# Altium PCB PCB1.PcbDoc (part 2 of 2)
Units mil, origin at the board's own origin, x right, y up, seen from the top; angles counter-clockwise.
Board outline 2145 x 1950 mil, 2 copper layers (Top Layer, Bottom Layer); 45 components, 40 nets, 204 pads, 256 vias.
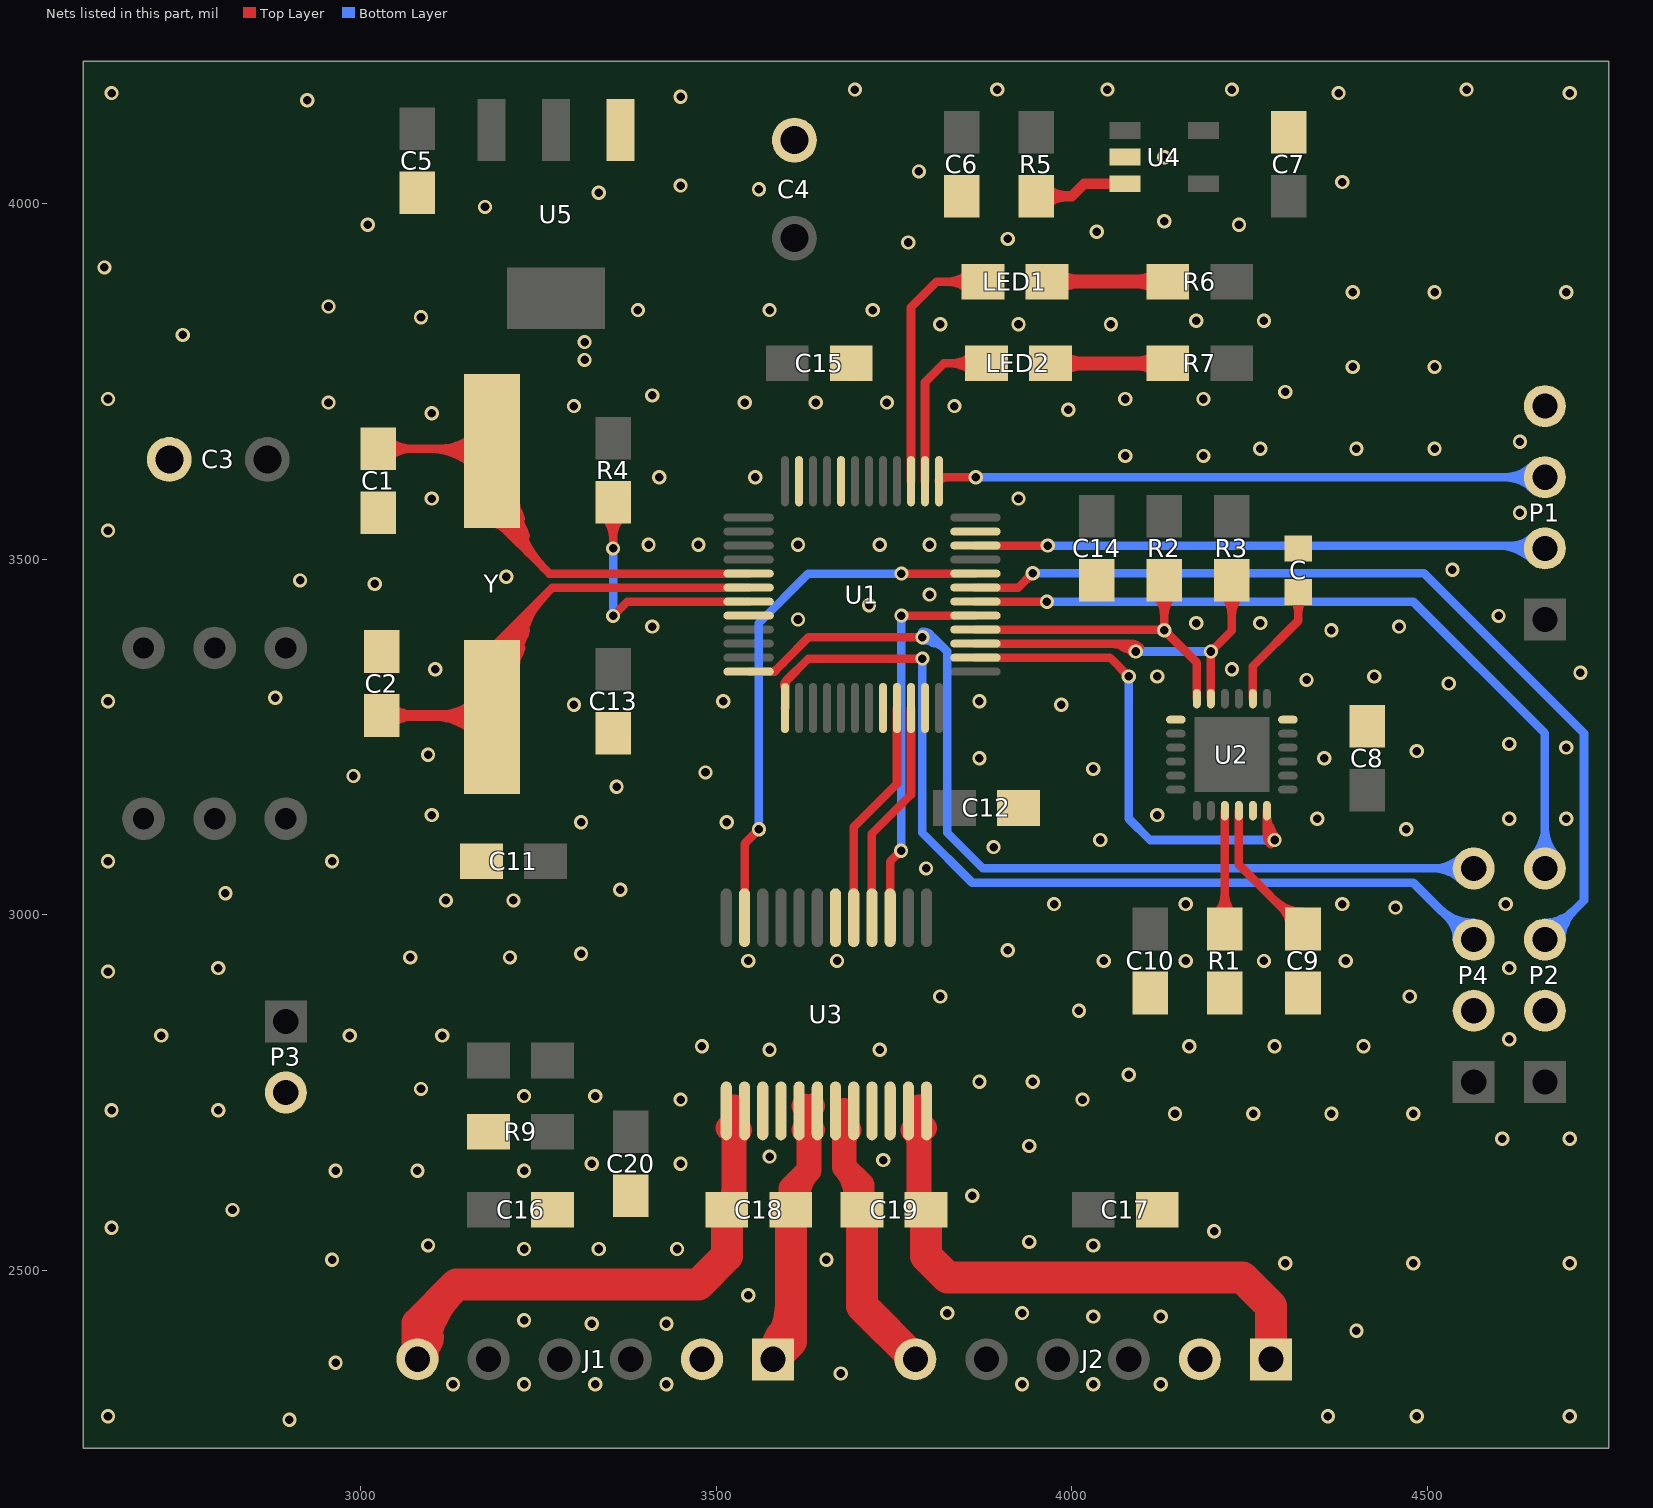
[diagram p2: the nets of this part, all layers, seen from the top]

## Via types
v1: diameter 20, hole 12, Top Layer to Bottom Layer, 256 vias

## Nets (pads, with @x,y where several pads share a name; then routed paths per layer and width w, separated by ;. In a path a pad name is that pad's centre, name@x,y a point inside that pad or via, vN(x,y) a via of type N, cw(c..) or ccw(c..) an arc to the next point about the centre after c; other vN are vias at no path point) (continued)
BIN1: U1.21 U3.17 | length 319.9
  Top Layer w12: U3.17@3693.39,2995.83 3693.39,3123.39 3754.21,3184.21 U1.21@3754.21,3290.55
BIN2: U1.22 U3.16 | length 317.5
  Top Layer w12: U3.16@3718.98,2995.83 3718.98,3113.98 3773.9,3168.9 U1.22@3773.9,3290.55
GND: C1.2 C2.2 C3.2 C4.2 C5.2 C6.2 C7.2 C8.2 C9.2 C10.2 C11.2 C12.2 C13.2 C14.2 C15.2 C16.1 C17.1 C20.2 C.2 J1.2 J2.2 P1.4 P2.2 P3.2 P4.2 R1.1 R9.1 U1.8 U1.20 U1.23 U1.35 U1.44 U1.47 U2.1 U2.11 U2.18 U3.3 U3.4 U3.9 U3.10 U3.18 U4.2 U5.1
  other v1: 2900,2290 2645,2295 4360,2295 4485,2295 4700,2295 3130,2340 3230,2340 3330,2340 3430,2340 3930,2340 4030,2340 4125,2340 3675,2355 2965,2370 4400,2415 3325,2425 3430,2425 3230,2430 4030,2435 4125,2435 3825,2440 3930,2440 3545,2465 4300,2510 4480,2510 4700,2510 2960,2515 3655,2515 3230,2530 3335,2530 3335,2530 3445,2530 3095,2535 4030,2535 3940,2540 4200,2555 2650,2560 2820,2585 3860,2605 2965,2640 3080,2640 3230,2640 3325,2650 3450,2650 3735,2655 3575,2660 3940,2675 4605,2685 4700,2685 4145,2720 4255,2720 4365,2720 4480,2720 2650,2725 2800,2725 3450,2740 4015,2740 3230,2745 3330,2745 3085,2755 3870,2765 3945,2765 4080,2775 3575,2810 3730,2810 3480,2815 4165,2815 4285,2815 4410,2815 4410,2815 4615,2825 2720,2830 2985,2830 3115,2830 4010,2865 3815,2885 4475,2885 2645,2920 2800,2925 4615,2925 3545,2935 3670,2935 4045,2935 4160,2935 4270,2935 4385,2935 3070,2940 3210,2940 3310,2945 3910,2950 4455,3010 3975,3015 4160,3015 4380,3015 4610,3015 3120,3020 3215,3020 2810,3030 3365,3035 3795,3065 2645,3075 2960,3075 3890,3095 4040,3105 4470,3120 3310,3130 3515,3130 4345,3135 4615,3135 4695,3135 3100,3140 4120,3140 3360,3180 2990,3195 3485,3200 4030,3205 3870,3220 4355,3220 3095,3225 4485,3230 4695,3235 4615,3240 3300,3295 3985,3295 2645,3300 3510,3300 3870,3300 2880,3305 4530,3325 4330,3330 4120,3335 4425,3335 4715,3340 3105,3345 4225,3345 4365,3400 3410,3405 4460,3405 4175,3410 4265,3410 3615,3415 4600,3420 4600,3420 3715,3435 3800,3450 3020,3465 2915,3470 3205,3475 4535,3485 3405,3520 3475,3520 3615,3520 3730,3520 3800,3520 2645,3540 4630,3565 3100,3585 3925,3585 3420,3615 3555,3615 4075,3645 4185,3645 4265,3655 4400,3655 4510,3655 4630,3665 3100,3705 3995,3710 3300,3715 3835,3715 2955,3720 3540,3720 3640,3720 3740,3720 2645,3725 4075,3725 4185,3725 3410,3730 4300,3735 4395,3770 4510,3770 3315,3780 3315,3805 2750,3815 3815,3830 3925,3830 4055,3830 4175,3835 4270,3835 3085,3840 3390,3850 3575,3850 3720,3850 2955,3855 4395,3875 4510,3875 4695,3875 2640,3910 3770,3945 3910,3950 4035,3960 3010,3970 4235,3970 4130,3975 3175,3995 3335,4015 3560,4020 3450,4025 4380,4030 3785,4045 4130,4065 2925,4145 3450,4150 2650,4155 4375,4155 4700,4155 3695,4160 3895,4160 4050,4160 4225,4160 4555,4160
INT: U1.26 U2.12 | length 905.8
  Top Layer w12: U1.26@3864.45,3361.42 4053.58,3361.42 v1(4080,3335) ; U2.12@4274.21,3146.26 4274.21,3115.79 v1(4285,3105) ; 4281.14,3117.86 ccw(c4291.59,3117.86) v1@4286.82,3108.56 ; 4274.21,3111.73 ccw(c4291.73,3111.73) v1@4279.34,3099.34 ; 4274.21,3111.73 ccw(c4291.73,3111.73) v1@4279.34,3099.34 ; 4274.21,3111.73 ccw(c4291.73,3111.73) v1@4279.34,3099.34 ; U2.12@4274.21,3140.7 ccw(c4320.7,3140.7) v1@4287.83,3107.83 ; U2.12@4274.21,3140.7 ccw(c4320.7,3140.7) v1@4287.83,3107.83 ; U2.12@4274.21,3140.7 ccw(c4320.7,3140.7) v1@4287.83,3107.83 ; 4278.85,3123.37 cw(c4259.07,3111.95) v1@4281.14,3106.04 ; 4278.85,3123.37 cw(c4259.07,3111.95) v1@4281.14,3106.04 ; 4278.85,3123.37 cw(c4259.07,3111.95) v1@4281.14,3106.04
  Bottom Layer w12: v1(4080,3335) 4080,3135 4110,3105 v1(4285,3105)
LED1: LED1.2 U1.39 | length 576.7
  Top Layer w12: U1.39@3773.9,3609.45 3773.9,3853.9 3810,3890 LED1.2@3875,3890 ; 3824.13,3890 cw(c3824.13,3844.13) LED1.2@3856.56,3876.56 ; 3824.13,3890 ccw(c3824.13,3935.87) LED1.2@3856.56,3903.44 ; 3824.13,3890 cw(c3824.13,3844.13) LED1.2@3856.56,3876.56 ; 3824.13,3890 ccw(c3824.13,3935.87) LED1.2@3856.56,3903.44 ; 3824.13,3890 cw(c3824.13,3844.13) LED1.2@3856.56,3876.56 ; 3824.13,3890 ccw(c3824.13,3935.87) LED1.2@3856.56,3903.44
LED2: LED2.2 U1.38 | length 452.7
  Top Layer w12: U1.38@3793.58,3609.45 3793.58,3748.58 3820,3775 LED2.2@3880,3775 ; 3829.13,3775 cw(c3829.13,3729.13) LED2.2@3861.56,3761.56 ; 3829.13,3775 ccw(c3829.13,3820.87) LED2.2@3861.56,3788.44 ; 3829.13,3775 cw(c3829.13,3729.13) LED2.2@3861.56,3761.56 ; 3829.13,3775 ccw(c3829.13,3820.87) LED2.2@3861.56,3788.44 ; 3829.13,3775 cw(c3829.13,3729.13) LED2.2@3861.56,3761.56 ; 3829.13,3775 ccw(c3829.13,3820.87) LED2.2@3861.56,3788.44
MA1: C18.1 J1.6 U3.1 U3.2 | length 1639.2
  Top Layer w35: C18.1@3515,2585 3525,2595 3525,2730 ; C18.1@3514.7,2590.3 ccw(c3489.82,2615.18) 3525,2615.18 ; C18.1@3514.7,2590.3 ccw(c3489.82,2615.18) 3525,2615.18 ; C18.1@3514.7,2590.3 ccw(c3489.82,2615.18) 3525,2615.18 ; C18.1@3514.7,2590.3 ccw(c3489.82,2615.18) 3525,2615.18 ; U3.1@3516.74,2700.01 cw(c3514.54,2691.79) U3.1@3521.91,2696.04 ; U3.1@3516.74,2700.01 cw(c3514.54,2691.79) U3.1@3521.91,2696.04 ; U3.1@3516.74,2700.01 cw(c3514.54,2691.79) U3.1@3521.91,2696.04 ; U3.1@3516.74,2700.01 cw(c3514.54,2691.79) U3.1@3521.91,2696.04 ; U3.1@3516.74,2700.01 cw(c3514.54,2691.79) U3.1@3521.91,2696.04 ; U3.1@3516.74,2700.01 cw(c3514.54,2691.79) U3.1@3521.91,2696.04 ; U3.1@3521.06,2697.52 cw(c3511.54,2688) 3525,2688 ; U3.1@3521.06,2697.52 cw(c3511.54,2688) 3525,2688 ; U3.1@3521.06,2697.52 cw(c3511.54,2688) 3525,2688 ; U3.1@3521.06,2697.52 cw(c3511.54,2688) 3525,2688 ; 3525,2678.11 cw(c3552.44,2678.11) U3.2@3533.04,2697.52 ; 3525,2678.11 cw(c3552.44,2678.11) U3.2@3533.04,2697.52 ; 3525,2678.11 cw(c3552.44,2678.11) U3.2@3533.04,2697.52 ; 3525,2678.11 cw(c3552.44,2678.11) U3.2@3533.04,2697.52
  Top Layer w45: J1.6@3080,2375 3080,2425 3135,2480 3475,2480 3515,2520 C18.1@3515,2585 ; J1.6@3076.49,2381.09 ccw(c3056.42,2415.85) 3095.19,2405.46 ; J1.6@3076.49,2381.09 ccw(c3056.42,2415.85) 3095.19,2405.46 ; J1.6@3076.49,2381.09 ccw(c3056.42,2415.85) 3095.19,2405.46 ; J1.6@3076.49,2381.09 ccw(c3056.42,2415.85) 3095.19,2405.46 ; J1.6@3076.49,2381.09 ccw(c3056.42,2415.85) 3095.19,2405.46 ; J1.6@3076.49,2381.09 ccw(c3056.42,2415.85) 3095.19,2405.46 ; J1.6@3087.03,2375 cw(c3224.7,2375) 3127.35,2472.35 ; J1.6@3087.03,2375 cw(c3224.7,2375) 3127.35,2472.35 ; J1.6@3087.03,2375 cw(c3224.7,2375) 3127.35,2472.35 ; J1.6@3087.03,2375 cw(c3224.7,2375) 3127.35,2472.35
MA2: C18.2 J1.1 U3.5 U3.6 | length 1570
  Top Layer w35: C18.2@3605,2585 3605,2615 3630.42,2640.42 ; 3630.42,2724.17 3630.42,2640.42 ; C18.2@3604.51,2590.11 ccw(c3573.16,2619.3) 3615.97,2620.83 ; C18.2@3604.51,2590.11 ccw(c3573.16,2619.3) 3615.97,2620.83 ; C18.2@3604.51,2590.11 ccw(c3573.16,2619.3) 3615.97,2620.83 ; C18.2@3604.51,2590.11 ccw(c3573.16,2619.3) 3615.97,2620.83 ; C18.2@3604.51,2590.11 ccw(c3573.16,2619.3) 3615.97,2620.83 ; C18.2@3604.51,2590.11 ccw(c3573.16,2619.3) 3615.97,2620.83 ; C18.2@3617.17,2587.2 cw(c3668.05,2602.79) 3630.42,2640.42 ; C18.2@3617.17,2587.2 cw(c3668.05,2602.79) 3630.42,2640.42 ; C18.2@3617.17,2587.2 cw(c3668.05,2602.79) 3630.42,2640.42 ; C18.2@3617.17,2587.2 cw(c3668.05,2602.79) 3630.42,2640.42 ; U3.5@3623.42,2697.52 cw(c3606.52,2680.61) 3630.42,2680.61 ; U3.5@3623.42,2697.52 cw(c3606.52,2680.61) 3630.42,2680.61 ; U3.5@3623.42,2697.52 cw(c3606.52,2680.61) 3630.42,2680.61 ; U3.5@3623.42,2697.52 cw(c3606.52,2680.61) 3630.42,2680.61 ; U3.5@3623.42,2730.98 cw(c3606.52,2714.08) 3630.42,2714.08 ; U3.5@3623.42,2730.98 cw(c3606.52,2714.08) 3630.42,2714.08 ; U3.5@3623.42,2730.98 cw(c3606.52,2714.08) 3630.42,2714.08 ; U3.5@3623.42,2730.98 cw(c3606.52,2714.08) 3630.42,2714.08 ; 3630.42,2685.5 cw(c3647.41,2685.5) U3.6@3635.4,2697.52 ; 3630.42,2685.5 cw(c3647.41,2685.5) U3.6@3635.4,2697.52 ; 3630.42,2685.5 cw(c3647.41,2685.5) U3.6@3635.4,2697.52 ; 3630.42,2685.5 cw(c3647.41,2685.5) U3.6@3635.4,2697.52 ; 3630.42,2718.96 cw(c3647.41,2718.96) U3.6@3635.4,2730.98 ; 3630.42,2718.96 cw(c3647.41,2718.96) U3.6@3635.4,2730.98 ; 3630.42,2718.96 cw(c3647.41,2718.96) U3.6@3635.4,2730.98 ; 3630.42,2718.96 cw(c3647.41,2718.96) U3.6@3635.4,2730.98
  Top Layer w45: J1.1@3580,2375 3605,2400 C18.2@3605,2585 ; J1.1@3575.03,2379.97 ccw(c3502.68,2452.32) 3605,2452.32 ; J1.1@3575.03,2379.97 ccw(c3502.68,2452.32) 3605,2452.32 ; J1.1@3575.03,2379.97 ccw(c3502.68,2452.32) 3605,2452.32 ; J1.1@3575.03,2379.97 ccw(c3502.68,2452.32) 3605,2452.32 ; J1.1@3586.79,2376.82 cw(c3625.56,2387.21) 3590.8,2407.28 ; J1.1@3586.79,2376.82 cw(c3625.56,2387.21) 3590.8,2407.28 ; J1.1@3586.79,2376.82 cw(c3625.56,2387.21) 3590.8,2407.28 ; J1.1@3586.79,2376.82 cw(c3625.56,2387.21) 3590.8,2407.28 ; J1.1@3586.79,2376.82 cw(c3625.56,2387.21) 3590.8,2407.28 ; J1.1@3586.79,2376.82 cw(c3625.56,2387.21) 3590.8,2407.28
MB1: C19.1 J2.6 U3.7 U3.8 | length 710.6
  Top Layer w35: 3680,2725 3680,2645 ; C19.1@3705,2585 3705,2620 3680,2645 ; 3680,2645 cw(c3641.04,2606.04) C19.1@3692.94,2587.52 ; 3680,2645 cw(c3641.04,2606.04) C19.1@3692.94,2587.52 ; 3680,2645 cw(c3641.04,2606.04) C19.1@3692.94,2587.52 ; 3680,2645 cw(c3641.04,2606.04) C19.1@3692.94,2587.52 ; 3680,2681.63 cw(c3702.46,2681.63) U3.8@3686.58,2697.52 ; 3680,2681.63 cw(c3702.46,2681.63) U3.8@3686.58,2697.52 ; 3680,2681.63 cw(c3702.46,2681.63) U3.8@3686.58,2697.52 ; 3680,2681.63 cw(c3702.46,2681.63) U3.8@3686.58,2697.52
  Top Layer w45: C19.1@3705,2585 3705,2450 J2.6@3780,2375
MB2: C19.2 J2.1 U3.11 U3.12 | length 1082.2
  Top Layer w35: 3785,2730 3785,2595 C19.2@3795,2585 ; U3.11@3776.96,2697.52 cw(c3757.56,2678.11) 3785,2678.11 ; U3.11@3776.96,2697.52 cw(c3757.56,2678.11) 3785,2678.11 ; U3.11@3776.96,2697.52 cw(c3757.56,2678.11) 3785,2678.11 ; U3.11@3776.96,2697.52 cw(c3757.56,2678.11) 3785,2678.11 ; 3785,2615.18 ccw(c3820.18,2615.18) C19.2@3795.3,2590.3 ; 3785,2615.18 ccw(c3820.18,2615.18) C19.2@3795.3,2590.3 ; 3785,2615.18 ccw(c3820.18,2615.18) C19.2@3795.3,2590.3 ; 3785,2615.18 ccw(c3820.18,2615.18) C19.2@3795.3,2590.3 ; 3785,2688 cw(c3798.46,2688) U3.12@3788.94,2697.52 ; 3785,2688 cw(c3798.46,2688) U3.12@3788.94,2697.52 ; 3785,2688 cw(c3798.46,2688) U3.12@3788.94,2697.52 ; 3785,2688 cw(c3798.46,2688) U3.12@3788.94,2697.52 ; U3.12@3788.09,2696.04 cw(c3795.46,2691.79) U3.12@3793.26,2700.01 ; U3.12@3788.09,2696.04 cw(c3795.46,2691.79) U3.12@3793.26,2700.01 ; U3.12@3788.09,2696.04 cw(c3795.46,2691.79) U3.12@3793.26,2700.01 ; U3.12@3788.09,2696.04 cw(c3795.46,2691.79) U3.12@3793.26,2700.01 ; U3.12@3788.09,2696.04 cw(c3795.46,2691.79) U3.12@3793.26,2700.01 ; U3.12@3788.09,2696.04 cw(c3795.46,2691.79) U3.12@3793.26,2700.01
  Top Layer w45: C19.2@3795,2585 3795,2520 3825,2490 4240,2490 4280,2450 J2.1@4280,2375
NetC1_1: C1.1 U1.5 Y.2 | length 3947.8
  Top Layer w12: C1.1@3025,3655 Y.2@3185,3655 ; Y.2@3185,3652.01 3185,3560 3265.47,3479.53 U1.5@3545.55,3479.53 ; C1.1@3038.44,3641.56 cw(c3070.87,3609.13) 3070.87,3655 ; C1.1@3038.44,3641.56 cw(c3070.87,3609.13) 3070.87,3655 ; C1.1@3038.44,3641.56 cw(c3070.87,3609.13) 3070.87,3655 ; C1.1@3038.44,3641.56 cw(c3070.87,3609.13) 3070.87,3655 ; C1.1@3038.44,3668.44 ccw(c3070.87,3700.87) 3070.87,3655 ; C1.1@3038.44,3668.44 ccw(c3070.87,3700.87) 3070.87,3655 ; C1.1@3038.44,3668.44 ccw(c3070.87,3700.87) 3070.87,3655 ; C1.1@3038.44,3668.44 ccw(c3070.87,3700.87) 3070.87,3655 ; 3097.21,3655 cw(c3097.21,3564.22) Y.2@3161.4,3628.41 ; 3097.21,3655 cw(c3097.21,3564.22) Y.2@3161.4,3628.41 ; 3097.21,3655 cw(c3097.21,3564.22) Y.2@3161.4,3628.41 ; 3097.21,3655 cw(c3097.21,3564.22) Y.2@3161.4,3628.41 ; 3111.66,3655 ccw(c3111.66,3725.34) Y.2@3161.4,3675.6 ; 3111.66,3655 ccw(c3111.66,3725.34) Y.2@3161.4,3675.6 ; 3111.66,3655 ccw(c3111.66,3725.34) Y.2@3161.4,3675.6 ; 3111.66,3655 ccw(c3111.66,3725.34) Y.2@3161.4,3675.6 ; 3126.18,3655 cw(c3126.18,3593.19) Y.2@3169.89,3636.9 ; 3126.18,3655 cw(c3126.18,3593.19) Y.2@3169.89,3636.9 ; 3126.18,3655 cw(c3126.18,3593.19) Y.2@3169.89,3636.9 ; 3126.18,3655 cw(c3126.18,3593.19) Y.2@3169.89,3636.9 ; 3140.63,3655 ccw(c3140.63,3696.37) Y.2@3169.89,3667.12 ; 3140.63,3655 ccw(c3140.63,3696.37) Y.2@3169.89,3667.12 ; 3140.63,3655 ccw(c3140.63,3696.37) Y.2@3169.89,3667.12 ; 3140.63,3655 ccw(c3140.63,3696.37) Y.2@3169.89,3667.12 ; Y.2@3182.31,3574.14 cw(c3166.81,3522.51) 3218.87,3536.46 ; Y.2@3182.31,3574.14 cw(c3166.81,3522.51) 3218.87,3536.46 ; Y.2@3182.31,3574.14 cw(c3166.81,3522.51) 3218.87,3536.46 ; Y.2@3182.31,3574.14 cw(c3166.81,3522.51) 3218.87,3536.46 ; Y.2@3182.31,3574.14 cw(c3166.81,3522.51) 3218.87,3536.46 ; Y.2@3182.31,3574.14 cw(c3166.81,3522.51) 3218.87,3536.46 ; Y.2@3185,3549.74 cw(c3185,3524.97) 3202.52,3542.48 ; Y.2@3185,3549.74 cw(c3185,3524.97) 3202.52,3542.48 ; Y.2@3185,3549.74 cw(c3185,3524.97) 3202.52,3542.48 ; Y.2@3185,3549.74 cw(c3185,3524.97) 3202.52,3542.48 ; Y.2@3186.04,3585.53 cw(c3154.49,3511.85) 3231.91,3532.59 ; Y.2@3186.04,3585.53 cw(c3154.49,3511.85) 3231.91,3532.59 ; Y.2@3186.04,3585.53 cw(c3154.49,3511.85) 3231.91,3532.59 ; Y.2@3186.04,3585.53 cw(c3154.49,3511.85) 3231.91,3532.59 ; Y.2@3186.04,3585.53 cw(c3154.49,3511.85) 3231.91,3532.59 ; Y.2@3186.04,3585.53 cw(c3154.49,3511.85) 3231.91,3532.59 ; Y.2@3190.76,3596.56 cw(c3166.86,3540.73) 3225.51,3556.45 ; Y.2@3190.76,3596.56 cw(c3166.86,3540.73) 3225.51,3556.45 ; Y.2@3190.76,3596.56 cw(c3166.86,3540.73) 3225.51,3556.45 ; Y.2@3190.76,3596.56 cw(c3166.86,3540.73) 3225.51,3556.45 ; Y.2@3190.76,3596.56 cw(c3166.86,3540.73) 3225.51,3556.45 ; Y.2@3190.76,3596.56 cw(c3166.86,3540.73) 3225.51,3556.45 ; Y.2@3194.37,3583.11 ccw(c3272.78,3583.11) 3217.34,3527.66 ; Y.2@3194.37,3583.11 ccw(c3272.78,3583.11) 3217.34,3527.66 ; Y.2@3194.37,3583.11 ccw(c3272.78,3583.11) 3217.34,3527.66 ; Y.2@3194.37,3583.11 ccw(c3272.78,3583.11) 3217.34,3527.66 ; Y.2@3206.37,3583.11 ccw(c3313.75,3583.11) 3237.82,3507.18 ; Y.2@3206.37,3583.11 ccw(c3313.75,3583.11) 3237.82,3507.18 ; Y.2@3206.37,3583.11 ccw(c3313.75,3583.11) 3237.82,3507.18 ; Y.2@3206.37,3583.11 ccw(c3313.75,3583.11) 3237.82,3507.18 ; Y.2@3218.37,3583.11 ccw(c3354.72,3583.11) 3258.31,3486.69 ; Y.2@3218.37,3583.11 ccw(c3354.72,3583.11) 3258.31,3486.69 ; Y.2@3218.37,3583.11 ccw(c3354.72,3583.11) 3258.31,3486.69 ; Y.2@3218.37,3583.11 ccw(c3354.72,3583.11) 3258.31,3486.69
NetC2_1: C2.1 U1.6 Y.1 | length 5441.2
  Top Layer w12: Y.1@3185,3280 3185,3375 3269.84,3459.84 U1.6@3545.55,3459.84 ; Y.1@3180.99,3355.36 ccw(c3134.91,3452.69) 3239.04,3425.22 ; Y.1@3180.99,3355.36 ccw(c3134.91,3452.69) 3239.04,3425.22 ; Y.1@3180.99,3355.36 ccw(c3134.91,3452.69) 3239.04,3425.22 ; Y.1@3180.99,3355.36 ccw(c3134.91,3452.69) 3239.04,3425.22 ; Y.1@3180.99,3355.36 ccw(c3134.91,3452.69) 3239.04,3425.22 ; Y.1@3180.99,3355.36 ccw(c3134.91,3452.69) 3239.04,3425.22 ; Y.1@3181.77,3368.02 ccw(c3177.32,3397.16) 3205.8,3389.53 ; Y.1@3181.77,3368.02 ccw(c3177.32,3397.16) 3205.8,3389.53 ; Y.1@3181.77,3368.02 ccw(c3177.32,3397.16) 3205.8,3389.53 ; Y.1@3181.77,3368.02 ccw(c3177.32,3397.16) 3205.8,3389.53 ; Y.1@3181.77,3368.02 ccw(c3177.32,3397.16) 3205.8,3389.53 ; Y.1@3181.77,3368.02 ccw(c3177.32,3397.16) 3205.8,3389.53 ; Y.1@3181.84,3355.71 ccw(c3161.5,3412.51) 3219.77,3396.89 ; Y.1@3181.84,3355.71 ccw(c3161.5,3412.51) 3219.77,3396.89 ; Y.1@3181.84,3355.71 ccw(c3161.5,3412.51) 3219.77,3396.89 ; Y.1@3181.84,3355.71 ccw(c3161.5,3412.51) 3219.77,3396.89 ; Y.1@3181.84,3355.71 ccw(c3161.5,3412.51) 3219.77,3396.89 ; Y.1@3181.84,3355.71 ccw(c3161.5,3412.51) 3219.77,3396.89 ; Y.1@3182.37,3346.89 cw(c3243.88,3346.89) 3200.39,3390.39 ; Y.1@3182.37,3346.89 cw(c3243.88,3346.89) 3200.39,3390.39 ; Y.1@3182.37,3346.89 cw(c3243.88,3346.89) 3200.39,3390.39 ; Y.1@3182.37,3346.89 cw(c3243.88,3346.89) 3200.39,3390.39 ; Y.1@3185.89,3344.41 ccw(c3170.89,3386.27) Y.1@3213.84,3374.76 ; Y.1@3185.89,3344.41 ccw(c3170.89,3386.27) Y.1@3213.84,3374.76 ; Y.1@3185.89,3344.41 ccw(c3170.89,3386.27) Y.1@3213.84,3374.76 ; Y.1@3185.89,3344.41 ccw(c3170.89,3386.27) Y.1@3213.84,3374.76 ; Y.1@3185.89,3344.41 ccw(c3170.89,3386.27) Y.1@3213.84,3374.76 ; Y.1@3185.89,3344.41 ccw(c3170.89,3386.27) Y.1@3213.84,3374.76 ; Y.1@3186.13,3344.51 ccw(c3149.34,3422.2) 3232.45,3400.27 ; Y.1@3186.13,3344.51 ccw(c3149.34,3422.2) 3232.45,3400.27 ; Y.1@3186.13,3344.51 ccw(c3149.34,3422.2) 3232.45,3400.27 ; Y.1@3186.13,3344.51 ccw(c3149.34,3422.2) 3232.45,3400.27 ; Y.1@3186.13,3344.51 ccw(c3149.34,3422.2) 3232.45,3400.27 ; Y.1@3186.13,3344.51 ccw(c3149.34,3422.2) 3232.45,3400.27 ; Y.1@3187.71,3380.15 ccw(c3191.75,3429.65) 3223.9,3391.79 ; Y.1@3187.71,3380.15 ccw(c3191.75,3429.65) 3223.9,3391.79 ; Y.1@3187.71,3380.15 ccw(c3191.75,3429.65) 3223.9,3391.79 ; Y.1@3187.71,3380.15 ccw(c3191.75,3429.65) 3223.9,3391.79 ; Y.1@3191.26,3333.67 ccw(c3163.78,3391.71) 3225.87,3375.32 ; Y.1@3191.26,3333.67 ccw(c3163.78,3391.71) 3225.87,3375.32 ; Y.1@3191.26,3333.67 ccw(c3163.78,3391.71) 3225.87,3375.32 ; Y.1@3191.26,3333.67 ccw(c3163.78,3391.71) 3225.87,3375.32 ; Y.1@3191.26,3333.67 ccw(c3163.78,3391.71) 3225.87,3375.32 ; Y.1@3191.26,3333.67 ccw(c3163.78,3391.71) 3225.87,3375.32 ; Y.1@3194.37,3346.89 cw(c3284.85,3346.89) 3220.87,3410.87 ; Y.1@3194.37,3346.89 cw(c3284.85,3346.89) 3220.87,3410.87 ; Y.1@3194.37,3346.89 cw(c3284.85,3346.89) 3220.87,3410.87 ; Y.1@3194.37,3346.89 cw(c3284.85,3346.89) 3220.87,3410.87 ; Y.1@3204.93,3354.61 cw(c3227.23,3363.25) Y.1@3211.75,3381.48 ; Y.1@3204.93,3354.61 cw(c3227.23,3363.25) Y.1@3211.75,3381.48 ; Y.1@3204.93,3354.61 cw(c3227.23,3363.25) Y.1@3211.75,3381.48 ; Y.1@3204.93,3354.61 cw(c3227.23,3363.25) Y.1@3211.75,3381.48 ; Y.1@3206.37,3346.89 cw(c3325.82,3346.89) 3241.36,3431.36 ; Y.1@3206.37,3346.89 cw(c3325.82,3346.89) 3241.36,3431.36 ; Y.1@3206.37,3346.89 cw(c3325.82,3346.89) 3241.36,3431.36 ; Y.1@3206.37,3346.89 cw(c3325.82,3346.89) 3241.36,3431.36 ; Y.1@3216.12,3358.94 cw(c3243.89,3369.7) 3224.62,3392.4 ; Y.1@3216.12,3358.94 cw(c3243.89,3369.7) 3224.62,3392.4 ; Y.1@3216.12,3358.94 cw(c3243.89,3369.7) 3224.62,3392.4 ; Y.1@3216.12,3358.94 cw(c3243.89,3369.7) 3224.62,3392.4 ; Y.1@3218.37,3346.89 cw(c3366.79,3346.89) 3261.84,3451.84 ; Y.1@3218.37,3346.89 cw(c3366.79,3346.89) 3261.84,3451.84 ; Y.1@3218.37,3346.89 cw(c3366.79,3346.89) 3261.84,3451.84 ; Y.1@3218.37,3346.89 cw(c3366.79,3346.89) 3261.84,3451.84
  Top Layer w15: C2.1@3030,3280 Y.1@3182.99,3280 ; C2.1@3042.37,3267.63 cw(c3072.25,3237.75) 3072.25,3280 ; C2.1@3042.37,3267.63 cw(c3072.25,3237.75) 3072.25,3280 ; C2.1@3042.37,3267.63 cw(c3072.25,3237.75) 3072.25,3280 ; C2.1@3042.37,3267.63 cw(c3072.25,3237.75) 3072.25,3280 ; C2.1@3042.37,3292.37 ccw(c3072.25,3322.25) 3072.25,3280 ; C2.1@3042.37,3292.37 ccw(c3072.25,3322.25) 3072.25,3280 ; C2.1@3042.37,3292.37 ccw(c3072.25,3322.25) 3072.25,3280 ; C2.1@3042.37,3292.37 ccw(c3072.25,3322.25) 3072.25,3280 ; 3103.21,3280 cw(c3103.21,3196.21) Y.1@3162.46,3255.46 ; 3103.21,3280 cw(c3103.21,3196.21) Y.1@3162.46,3255.46 ; 3103.21,3280 cw(c3103.21,3196.21) Y.1@3162.46,3255.46 ; 3103.21,3280 cw(c3103.21,3196.21) Y.1@3162.46,3255.46 ; 3112.9,3280 ccw(c3112.9,3350.09) Y.1@3162.46,3300.53 ; 3112.9,3280 ccw(c3112.9,3350.09) Y.1@3162.46,3300.53 ; 3112.9,3280 ccw(c3112.9,3350.09) Y.1@3162.46,3300.53 ; 3112.9,3280 ccw(c3112.9,3350.09) Y.1@3162.46,3300.53 ; 3139.43,3280 cw(c3139.43,3232.42) Y.1@3173.07,3266.06 ; 3139.43,3280 cw(c3139.43,3232.42) Y.1@3173.07,3266.06 ; 3139.43,3280 cw(c3139.43,3232.42) Y.1@3173.07,3266.06 ; 3139.43,3280 cw(c3139.43,3232.42) Y.1@3173.07,3266.06
NetC9_1: C9.1 U2.10 | length 393.2
  Top Layer w12: U2.10@4234.84,3146.26 4234.84,3070.16 C9.1@4325,2980 ; 4284.03,3020.97 ccw(c4325,3061.94) 4325,3004 cw(c4325,3061.94) 4284.03,3020.97 ; 4296.1,3008.9 cw(c4272.2,2985) 4306,2985 ccw(c4272.2,2985) 4296.1,3008.9 ; C9.1@4304.51,3000.49 ccw(c4325,3020.97) 4325,2992 cw(c4325,3020.97) C9.1@4304.51,3000.49
NetC_1: C.1 U2.20 | length 363.3
  Top Layer w12: U2.20@4254.53,3303.74 4254.53,3349.53 4318.35,3413.35 C.1@4318.35,3453.94 ; C.1@4309.64,3445.23 cw(c4288.63,3424.22) 4318.35,3424.22 ; C.1@4309.64,3445.23 cw(c4288.63,3424.22) 4318.35,3424.22 ; C.1@4309.64,3445.23 cw(c4288.63,3424.22) 4318.35,3424.22 ; C.1@4309.64,3445.23 cw(c4288.63,3424.22) 4318.35,3424.22 ; 4318.35,3424.22 cw(c4348.06,3424.22) C.1@4327.05,3445.23 ; 4318.35,3424.22 cw(c4348.06,3424.22) C.1@4327.05,3445.23 ; 4318.35,3424.22 cw(c4348.06,3424.22) C.1@4327.05,3445.23 ; 4318.35,3424.22 cw(c4348.06,3424.22) C.1@4327.05,3445.23
NetLED1_1: LED1.1 R6.1 | length 511.3
  Top Layer w20: LED1.1@3965,3890 R6.1@4135,3890 ; LED1.1@3980.61,3879.39 cw(c4006.21,3853.79) 4006.21,3890 ; LED1.1@3980.61,3879.39 cw(c4006.21,3853.79) 4006.21,3890 ; LED1.1@3980.61,3879.39 cw(c4006.21,3853.79) 4006.21,3890 ; LED1.1@3980.61,3900.61 ccw(c4006.21,3926.21) 4006.21,3890 ; LED1.1@3980.61,3900.61 ccw(c4006.21,3926.21) 4006.21,3890 ; LED1.1@3980.61,3900.61 ccw(c4006.21,3926.21) 4006.21,3890 ; 4093.79,3890 cw(c4093.79,3853.79) R6.1@4119.39,3879.39 ; 4093.79,3890 ccw(c4093.79,3926.21) R6.1@4119.39,3900.61 ; 4093.79,3890 cw(c4093.79,3853.79) R6.1@4119.39,3879.39 ; 4093.79,3890 ccw(c4093.79,3926.21) R6.1@4119.39,3900.61 ; 4093.79,3890 cw(c4093.79,3853.79) R6.1@4119.39,3879.39 ; 4093.79,3890 ccw(c4093.79,3926.21) R6.1@4119.39,3900.61
NetLED2_1: LED2.1 R7.1 | length 506.3
  Top Layer w20: LED2.1@3970,3775 R7.1@4135,3775 ; LED2.1@3985.61,3764.39 cw(c4011.21,3738.79) 4011.21,3775 ; LED2.1@3985.61,3764.39 cw(c4011.21,3738.79) 4011.21,3775 ; LED2.1@3985.61,3764.39 cw(c4011.21,3738.79) 4011.21,3775 ; LED2.1@3985.61,3785.61 ccw(c4011.21,3811.21) 4011.21,3775 ; LED2.1@3985.61,3785.61 ccw(c4011.21,3811.21) 4011.21,3775 ; LED2.1@3985.61,3785.61 ccw(c4011.21,3811.21) 4011.21,3775 ; 4093.79,3775 cw(c4093.79,3738.79) R7.1@4119.39,3764.39 ; 4093.79,3775 ccw(c4093.79,3811.21) R7.1@4119.39,3785.61 ; 4093.79,3775 cw(c4093.79,3738.79) R7.1@4119.39,3764.39 ; 4093.79,3775 ccw(c4093.79,3811.21) R7.1@4119.39,3785.61 ; 4093.79,3775 cw(c4093.79,3738.79) R7.1@4119.39,3764.39 ; 4093.79,3775 ccw(c4093.79,3811.21) R7.1@4119.39,3785.61
NetR1_2: R1.2 U2.9 | length 454.3
  Top Layer w12: R1.2@4215.16,2980.16 U2.9@4215.16,3146.26 ; R1.2@4201.56,2998.44 ccw(c4168.75,3031.25) 4215.16,3031.25 ; R1.2@4201.56,2998.44 ccw(c4168.75,3031.25) 4215.16,3031.25 ; R1.2@4201.56,2998.44 ccw(c4168.75,3031.25) 4215.16,3031.25 ; R1.2@4201.56,2998.44 ccw(c4168.75,3031.25) 4215.16,3031.25 ; 4215.16,3030.49 ccw(c4260.49,3030.49) R1.2@4228.44,2998.44 ; 4215.16,3030.49 ccw(c4260.49,3030.49) R1.2@4228.44,2998.44 ; 4215.16,3030.49 ccw(c4260.49,3030.49) R1.2@4228.44,2998.44 ; 4215.16,3030.49 ccw(c4260.49,3030.49) R1.2@4228.44,2998.44
NetR5_1: R5.1 U4.3 | length 331.3
  Top Layer w15: R5.1@3950,4010 4000,4010 4017.6,4027.6 U4.3@4074.88,4027.6 ; R5.1@3962.37,3997.63 cw(c3992.25,3967.75) 3992.25,4010 ; R5.1@3962.37,3997.63 cw(c3992.25,3967.75) 3992.25,4010 ; R5.1@3962.37,3997.63 cw(c3992.25,3967.75) 3992.25,4010 ; R5.1@3962.37,4022.37 ccw(c3992.25,4052.25) 3992.25,4010 ; R5.1@3962.37,4022.37 ccw(c3992.25,4052.25) 3992.25,4010 ; R5.1@3962.37,4022.37 ccw(c3992.25,4052.25) 3992.25,4010
NRST: R4.2 U1.7 | length 647.1
  Top Layer w12: v1(3355,3420) 3375.16,3440.16 U1.7@3545.55,3440.16 ; v1(3355,3515) R4.2@3355,3580 ; R4.2@3341.56,3561.56 cw(c3309.13,3529.13) 3355,3529.13 ; R4.2@3341.56,3561.56 cw(c3309.13,3529.13) 3355,3529.13 ; R4.2@3341.56,3561.56 cw(c3309.13,3529.13) 3355,3529.13 ; R4.2@3341.56,3561.56 cw(c3309.13,3529.13) 3355,3529.13 ; 3355,3529.13 cw(c3400.87,3529.13) R4.2@3368.44,3561.56 ; 3355,3529.13 cw(c3400.87,3529.13) R4.2@3368.44,3561.56 ; 3355,3529.13 cw(c3400.87,3529.13) R4.2@3368.44,3561.56 ; 3355,3529.13 cw(c3400.87,3529.13) R4.2@3368.44,3561.56
  Bottom Layer w12: v1(3355,3420) v1(3355,3515)
PWMA: U1.32 U3.23 | length 755.8
  Top Layer w12: U3.23@3539.84,2995.83 3539.84,3099.84 v1(3560,3120) ; v1(3760.47,3479.53) U1.32@3864.45,3479.53
  Bottom Layer w12: v1(3560,3120) 3560,3410 3629.53,3479.53 v1(3760.47,3479.53)
PWMB: U1.29 U3.15 | length 569.9
  Top Layer w12: U3.15@3744.57,2995.83 3744.57,3074.57 v1(3760,3090) ; v1(3760.47,3420.47) U1.29@3864.45,3420.47
  Bottom Layer w12: v1(3760,3090) v1@3760,3420 ; 3760,3409.68 cw(c3771.27,3409.68) v1@3763.3,3417.64 ; 3760,3409.68 cw(c3771.27,3409.68) v1@3763.3,3417.64 ; 3760,3409.68 cw(c3771.27,3409.68) v1@3763.3,3417.64 ; 3760,3409.68 cw(c3771.27,3409.68) v1@3763.3,3417.64
RX: P2.3 U1.31 | length 2167.9
  Top Layer w12: U1.31@3864.45,3459.84 3924.84,3459.84 v1(3945,3480)
  Bottom Layer w12: v1(3945,3480) 4495,3480 4720,3255 4720,3020 P2.3@4665,2965 ; P2.3@4664.54,2965.09 cw(c4704.45,2956.92) 4693.9,2996.27 ; P2.3@4664.54,2965.09 cw(c4704.45,2956.92) 4693.9,2996.27 ; P2.3@4664.54,2965.09 cw(c4704.45,2956.92) 4693.9,2996.27 ; P2.3@4664.54,2965.09 cw(c4704.45,2956.92) 4693.9,2996.27 ; P2.3@4664.54,2965.09 cw(c4704.45,2956.92) 4693.9,2996.27 ; P2.3@4664.54,2965.09 cw(c4704.45,2956.92) 4693.9,2996.27 ; P2.3@4665,2988.53 ccw(c4665,3045.33) 4705.16,3005.16 ; P2.3@4665,2988.53 ccw(c4665,3045.33) 4705.16,3005.16 ; P2.3@4665,2988.53 ccw(c4665,3045.33) 4705.16,3005.16 ; P2.3@4665,2988.53 ccw(c4665,3045.33) 4705.16,3005.16 ; P2.3@4665.09,2964.54 ccw(c4656.92,3004.45) 4696.27,2993.9 ; P2.3@4665.09,2964.54 ccw(c4656.92,3004.45) 4696.27,2993.9 ; P2.3@4665.09,2964.54 ccw(c4656.92,3004.45) 4696.27,2993.9 ; P2.3@4665.09,2964.54 ccw(c4656.92,3004.45) 4696.27,2993.9 ; P2.3@4665.09,2964.54 ccw(c4656.92,3004.45) 4696.27,2993.9 ; P2.3@4665.09,2964.54 ccw(c4656.92,3004.45) 4696.27,2993.9 ; P2.3@4688.53,2965 cw(c4745.33,2965) 4705.16,3005.16 ; P2.3@4688.53,2965 cw(c4745.33,2965) 4705.16,3005.16 ; P2.3@4688.53,2965 cw(c4745.33,2965) 4705.16,3005.16 ; P2.3@4688.53,2965 cw(c4745.33,2965) 4705.16,3005.16
RX2: P4.3 U1.13 | length 1504.2
  Top Layer w12: U1.13@3596.73,3290.55 3597.91,3291.72 3597.91,3328.14 ; v1(3790,3360) 3629.77,3360 3597.91,3328.14 ; U1.13@3596.24,3320.47 cw(c3610.74,3320.47) 3600.49,3330.73 ; U1.13@3596.24,3320.47 cw(c3610.74,3320.47) 3600.49,3330.73 ; U1.13@3596.24,3320.47 cw(c3610.74,3320.47) 3600.49,3330.73 ; U1.13@3596.28,3320.29 cw(c3603.07,3322.98) 3597.91,3328.14 ; U1.13@3596.28,3320.29 cw(c3603.07,3322.98) 3597.91,3328.14 ; U1.13@3596.28,3320.29 cw(c3603.07,3322.98) 3597.91,3328.14
  Bottom Layer w12: v1(3790,3360) 3790,3115 3860,3045 4480,3045 P4.3@4562.5,2962.5 ; 4516.3,3008.7 ccw(c4565,3057.4) P4.3@4565,2988.53 ; 4528.37,2996.63 cw(c4496.74,2965) P4.3@4541.47,2965 ; 4536.79,2988.21 ccw(c4565,3016.43) P4.3@4565,2976.53
SCL: R3.1 U1.27 U2.23 | length 1163.7
  Top Layer w12: U1.27@3864.45,3381.1 4078.9,3381.1 v1(4090,3370) ; U2.23@4195.47,3303.74 v1(4195.47,3370) 4225,3399.53 R3.1@4225,3470 ; 4053.54,3381.1 cw(c4053.54,3333.54) v1@4087.17,3367.17 ; 4053.54,3381.1 cw(c4053.54,3333.54) v1@4087.17,3367.17 ; 4053.54,3381.1 cw(c4053.54,3333.54) v1@4087.17,3367.17 ; 4053.54,3381.1 cw(c4053.54,3333.54) v1@4087.17,3367.17 ; 4071.63,3376.15 ccw(c4083.05,3395.93) v1@4088.96,3373.86 ; 4071.63,3376.15 ccw(c4083.05,3395.93) v1@4088.96,3373.86 ; 4071.63,3376.15 ccw(c4083.05,3395.93) v1@4088.96,3373.86 ; 4071.63,3376.15 ccw(c4083.05,3395.93) v1@4088.96,3373.86 ; 4071.63,3376.15 ccw(c4083.05,3395.93) v1@4088.96,3373.86 ; 4071.63,3376.15 ccw(c4083.05,3395.93) v1@4088.96,3373.86 ; 4077.14,3373.86 cw(c4077.14,3363.41) v1@4086.44,3368.18 ; 4077.14,3373.86 cw(c4077.14,3363.41) v1@4086.44,3368.18 ; 4077.14,3373.86 cw(c4077.14,3363.41) v1@4086.44,3368.18 ; 4077.14,3373.86 cw(c4077.14,3363.41) v1@4086.44,3368.18 ; 4082.51,3381.1 cw(c4082.51,3362.51) v1@4095.66,3375.66 ; 4082.51,3381.1 cw(c4082.51,3362.51) v1@4095.66,3375.66 ; 4082.51,3381.1 cw(c4082.51,3362.51) v1@4095.66,3375.66 ; 4082.51,3381.1 cw(c4082.51,3362.51) v1@4095.66,3375.66 ; R3.1@4211.56,3451.56 cw(c4179.13,3419.13) 4225,3419.13 ; R3.1@4211.56,3451.56 cw(c4179.13,3419.13) 4225,3419.13 ; R3.1@4211.56,3451.56 cw(c4179.13,3419.13) 4225,3419.13 ; R3.1@4211.56,3451.56 cw(c4179.13,3419.13) 4225,3419.13 ; 4225,3419.13 cw(c4270.87,3419.13) R3.1@4238.44,3451.56 ; 4225,3419.13 cw(c4270.87,3419.13) R3.1@4238.44,3451.56 ; 4225,3419.13 cw(c4270.87,3419.13) R3.1@4238.44,3451.56 ; 4225,3419.13 cw(c4270.87,3419.13) R3.1@4238.44,3451.56
  Bottom Layer w12: v1(4090,3370) v1(4195.47,3370)
SDA: R2.1 U1.28 U2.24 | length 776.2
  Top Layer w12: U1.28@3864.45,3400.79 v1@4129.21,3400.79 ; v1(4130,3400) 4175.79,3354.21 U2.24@4175.79,3303.74 ; v1@4130,3400.79 R2.1@4130,3470 ; R2.1@4116.56,3451.56 cw(c4084.13,3419.13) 4130,3419.13 ; R2.1@4116.56,3451.56 cw(c4084.13,3419.13) 4130,3419.13 ; R2.1@4116.56,3451.56 cw(c4084.13,3419.13) 4130,3419.13 ; R2.1@4116.56,3451.56 cw(c4084.13,3419.13) 4130,3419.13 ; 4118.44,3400.79 cw(c4118.44,3388.44) v1@4127.17,3397.17 ; 4118.44,3400.79 cw(c4118.44,3388.44) v1@4127.17,3397.17 ; 4118.44,3400.79 cw(c4118.44,3388.44) v1@4127.17,3397.17 ; 4118.44,3400.79 cw(c4118.44,3388.44) v1@4127.17,3397.17 ; 4130,3419.13 cw(c4175.87,3419.13) R2.1@4143.44,3451.56 ; 4130,3419.13 cw(c4175.87,3419.13) R2.1@4143.44,3451.56 ; 4130,3419.13 cw(c4175.87,3419.13) R2.1@4143.44,3451.56 ; 4130,3419.13 cw(c4175.87,3419.13) R2.1@4143.44,3451.56
SWCLK: P1.3 U1.37 | length 1302.6
  Top Layer w12: U1.37@3813.27,3609.45 3818.82,3615 ; v1(3865,3615) 3818.82,3615 ; U1.37@3812.78,3609.49 cw(c3818.82,3608.94) 3818.82,3615 ; U1.37@3812.78,3609.49 cw(c3818.82,3608.94) 3818.82,3615 ; U1.37@3812.78,3609.49 cw(c3818.82,3608.94) 3818.82,3615 ; U1.37@3812.78,3609.49 cw(c3818.82,3608.94) 3818.82,3615 ; U1.37@3812.92,3609.79 cw(c3825.49,3597.23) 3825.49,3615 ; U1.37@3812.92,3609.79 cw(c3825.49,3597.23) 3825.49,3615 ; U1.37@3812.92,3609.79 cw(c3825.49,3597.23) 3825.49,3615 ; U1.37@3812.92,3609.79 cw(c3825.49,3597.23) 3825.49,3615
  Bottom Layer w12: v1(3865,3615) P1.3@4665,3615 ; 4608.2,3615 cw(c4608.2,3558.2) P1.3@4648.36,3598.36 ; 4608.2,3615 ccw(c4608.2,3671.8) P1.3@4648.36,3631.64 ; 4608.2,3615 cw(c4608.2,3558.2) P1.3@4648.36,3598.36 ; 4608.2,3615 ccw(c4608.2,3671.8) P1.3@4648.36,3631.64 ; 4608.2,3615 cw(c4608.2,3558.2) P1.3@4648.36,3598.36 ; 4608.2,3615 ccw(c4608.2,3671.8) P1.3@4648.36,3631.64 ; 4608.2,3615 cw(c4608.2,3558.2) P1.3@4648.36,3598.36 ; 4608.2,3615 ccw(c4608.2,3671.8) P1.3@4648.36,3631.64
SWDIO: P1.2 U1.34 | length 1288.3
  Top Layer w12: U1.34@3864.45,3518.9 v1(3966.1,3518.9)
  Bottom Layer w12: v1(3966.1,3518.9) 4661.1,3518.9 P1.2@4665,3515 ; 4598.79,3518.9 cw(c4598.79,3448.79) P1.2@4648.36,3498.36 ; 4598.79,3518.9 cw(c4598.79,3448.79) P1.2@4648.36,3498.36 ; 4598.79,3518.9 cw(c4598.79,3448.79) P1.2@4648.36,3498.36 ; 4598.79,3518.9 cw(c4598.79,3448.79) P1.2@4648.36,3498.36 ; 4617.61,3518.9 ccw(c4617.61,3562.39) P1.2@4648.36,3531.64 ; 4617.61,3518.9 ccw(c4617.61,3562.39) P1.2@4648.36,3531.64 ; 4617.61,3518.9 ccw(c4617.61,3562.39) P1.2@4648.36,3531.64 ; 4617.61,3518.9 ccw(c4617.61,3562.39) P1.2@4648.36,3531.64 ; 4627.76,3518.9 cw(c4627.76,3477.76) P1.2@4656.85,3506.85 ; 4627.76,3518.9 cw(c4627.76,3477.76) P1.2@4656.85,3506.85 ; 4627.76,3518.9 cw(c4627.76,3477.76) P1.2@4656.85,3506.85 ; 4627.76,3518.9 cw(c4627.76,3477.76) P1.2@4656.85,3506.85
TX: P2.4 U1.30 | length 1424.1
  Top Layer w12: U1.30@3864.45,3440.16 v1(3965,3440)
  Bottom Layer w12: v1(3965,3440) 4480,3440 4665,3255 P2.4@4665,3065 ; P2.4@4648.36,3081.64 ccw(c4608.2,3121.8) 4665,3121.8 ; P2.4@4648.36,3081.64 ccw(c4608.2,3121.8) 4665,3121.8 ; P2.4@4648.36,3081.64 ccw(c4608.2,3121.8) 4665,3121.8 ; P2.4@4648.36,3081.64 ccw(c4608.2,3121.8) 4665,3121.8 ; 4665,3121.8 ccw(c4721.8,3121.8) P2.4@4681.64,3081.64 ; 4665,3121.8 ccw(c4721.8,3121.8) P2.4@4681.64,3081.64 ; 4665,3121.8 ccw(c4721.8,3121.8) P2.4@4681.64,3081.64 ; 4665,3121.8 ccw(c4721.8,3121.8) P2.4@4681.64,3081.64
TX2: P4.4 U1.12 | length 1640.2
  Top Layer w12: U1.12@3545.55,3341.73 3581.97,3341.73 3593.98,3353.75 3593.98,3353.98 3630,3390 v1(3790,3390) ; U1.12@3575.47,3341.24 ccw(c3575.47,3355.75) 3585.73,3345.49 ; U1.12@3575.47,3341.24 ccw(c3575.47,3355.75) 3585.73,3345.49 ; U1.12@3575.47,3341.24 ccw(c3575.47,3355.75) 3585.73,3345.49
  Bottom Layer w12: v1(3790,3390) 3805,3390 3825,3370 3825,3115 3875,3065 P4.4@4545,3065 ; v1@3791.23,3386.19 cw(c3794.44,3376.25) 3801.83,3383.64 ; P4.4@4548.36,3048.36 ccw(c4508.2,3008.2) 4508.2,3065 ccw(c4508.2,3121.8) P4.4@4548.36,3081.64 ; v1@3790,3386 cw(c3790,3340.13) 3822.44,3372.56 ; v1@3790,3386 cw(c3790,3340.13) 3822.44,3372.56 ; v1@3790,3386 cw(c3790,3340.13) 3822.44,3372.56 ; v1@3790,3398 cw(c3790,3381.1) 3801.95,3393.05 ; v1@3790,3398 cw(c3790,3381.1) 3801.95,3393.05 ; v1@3790,3398 cw(c3790,3381.1) 3801.95,3393.05 ; v1@3793.46,3392 ccw(c3813.25,3403.42) 3807.34,3381.35 ; v1@3793.46,3392 ccw(c3813.25,3403.42) 3807.34,3381.35 ; v1@3793.46,3392 ccw(c3813.25,3403.42) 3807.34,3381.35
pads on no net: K.1 K.4 U1.1 U1.2 U1.3 U1.4 U1.14 U1.25 U1.33 U1.40 U1.41 U1.42 U1.43 U1.45 U1.46 U2.0 U2.2 U2.3 U2.4 U2.5 U2.6 U2.7 U2.14 U2.15 U2.16 U2.17 U2.19 U2.21 U2.22 U4.4

## Polygon pours and split planes (outlines as drawn)
GND on Bottom Layer "Bottom Layer-No Net" (solid, pour order 4): 2615,4195.52 2615,2255.52 4750,2255.52 4750,4195.52
GND on Top Layer "Bottom Layer-No Net" (solid, pour order 3): 2615,4195 2615,2255 4750,2255 4750,4195

## Keep-outs
Keep-Out Layer:
  circle w10: c4585,4030 r90
  circle w10: c4585,2410 r90
  circle w10: c2775,2410 r90
  circle w10: c2775,4030 r90
  lines w10: 2610,2250 2610,4200 4755,4200 4755,2250 2610,2250

## Other copper
Top Layer:
  region net 12.0V: 3770,3025 3795,3025 3795,2935 3790,2930 3770.16,2930
  region net 12.0V: 3515,3025 3395,2905 3515,2905

## Silkscreen, mask and mechanical layers (free items; w line width, h text height)
Top Overlay:
  text "55x50" at 2640,3855 h40
  text "GND" at 4480,3710 h40
  text "SWCLK" at 4480,3605 h40
  text "SWIO" at 4475,3510 h40
  text "+3.3V" at 4480,3405 h40
  text "UART" at 4625,3165 h40
  text "TX" at 4435,3060 h40
  text "RX" at 4435,2950 h40
  text "+12V" at 2845,2925 h40
  text "GND" at 4420,2845 h40
  text "+5.0V" at 4415,2755 h40
  text "GND" at 2855,2650 h40
  text "Control board V1.0" at 4245,2620 h40
  text "2018.10.13" at 4295,2575 h40
  text "M2" at 3055,2280 h40
  text "VCC" at 3145,2280 h40
  text "C1" at 3260,2280 h40
  text "C2" at 3360,2280 h40
  text "GND" at 3445,2280 h40
  text "M1" at 3560,2280 h40
  text "M2" at 3760,2280 h40
  text "VCC" at 3850,2280 h40
  text "C1" at 3965,2280 h40
  text "C2" at 4065,2280 h40
  text "GND" at 4150,2280 h40
  text "M1" at 4265,2280 h40